# Altium PCB Mic_Array_v2.PcbDoc
Units mm, origin at the board's own origin, x right, y up, seen from the top; angles counter-clockwise.
Board outline 97 x 78 mm, 2 copper layers (Top Layer, Bottom Layer); 105 components, 87 nets, 390 pads, 189 vias.
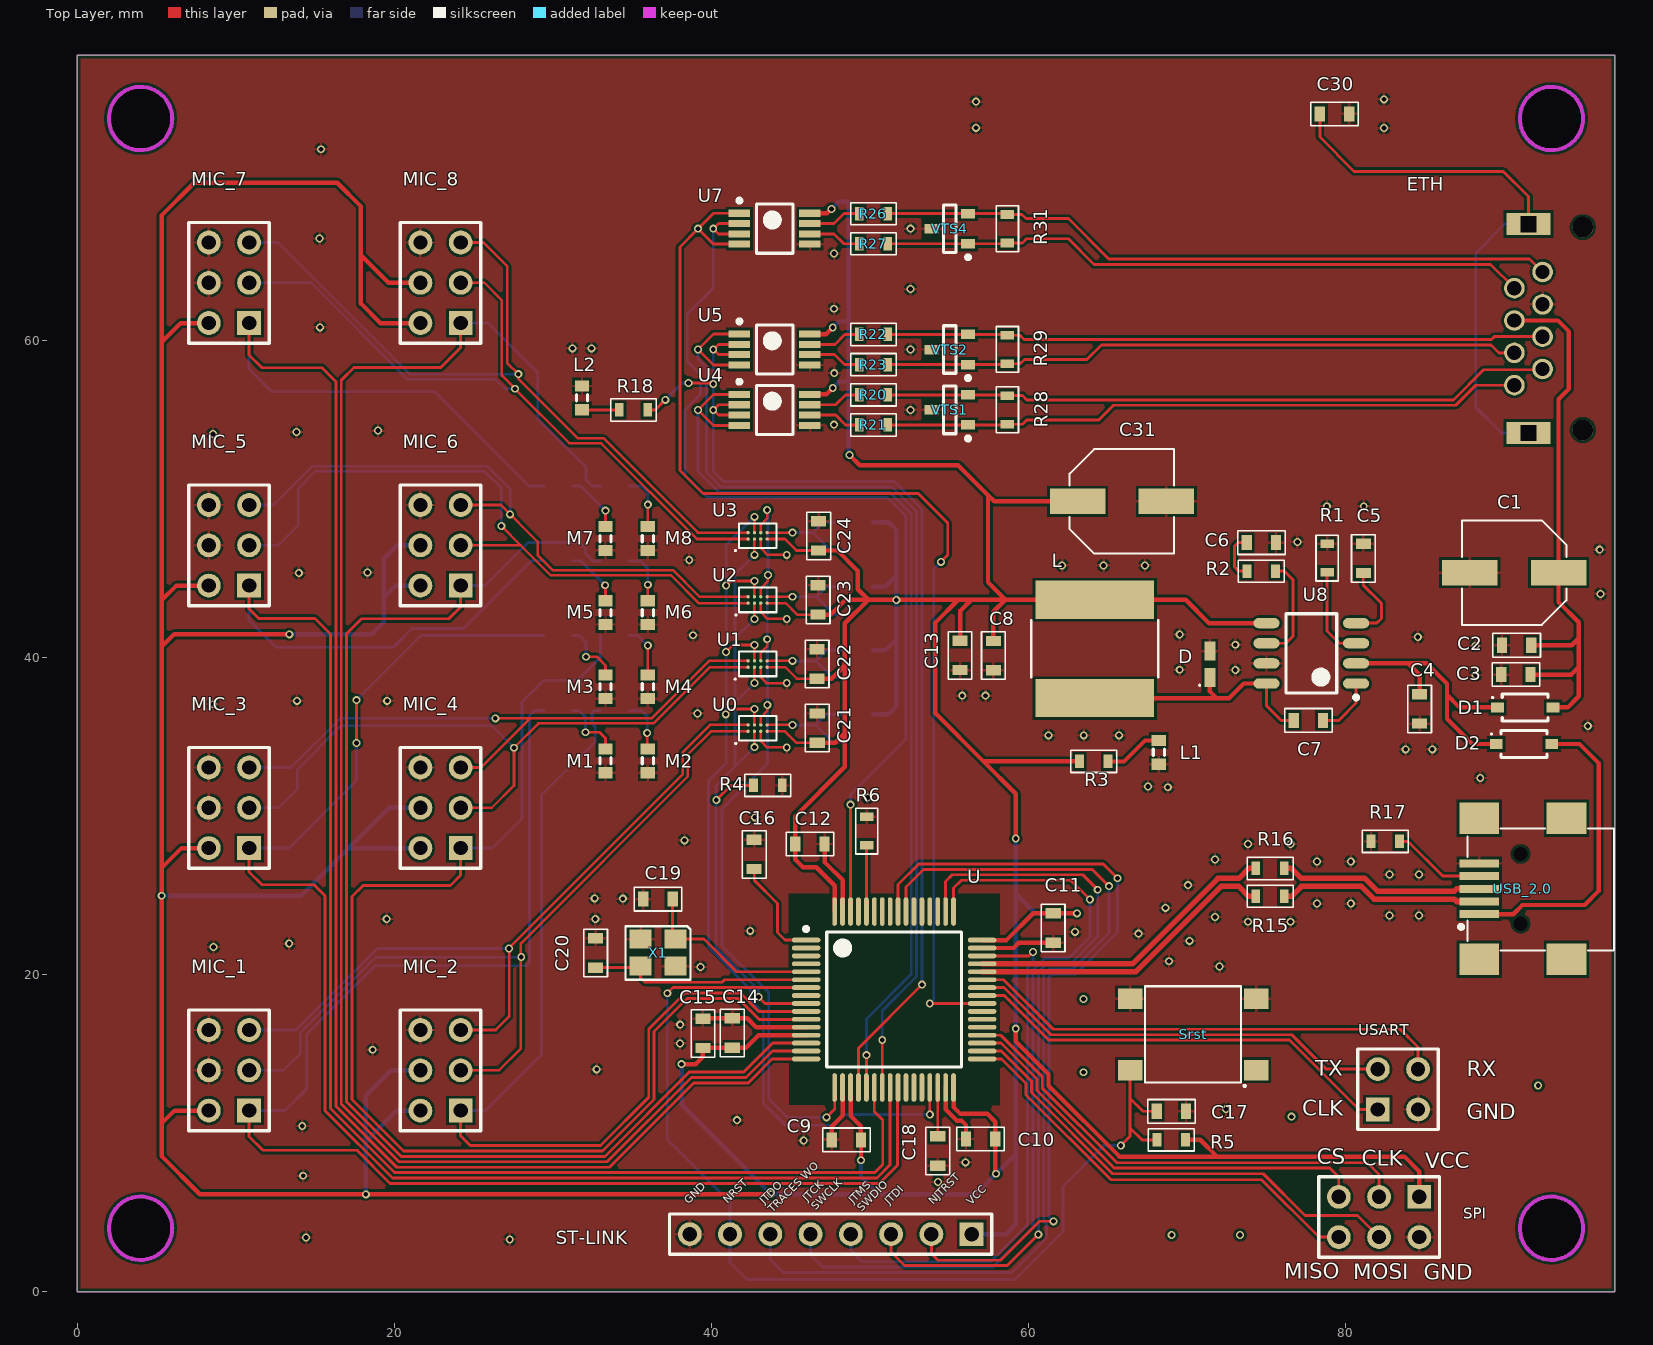
[diagram p0: Top Layer view]
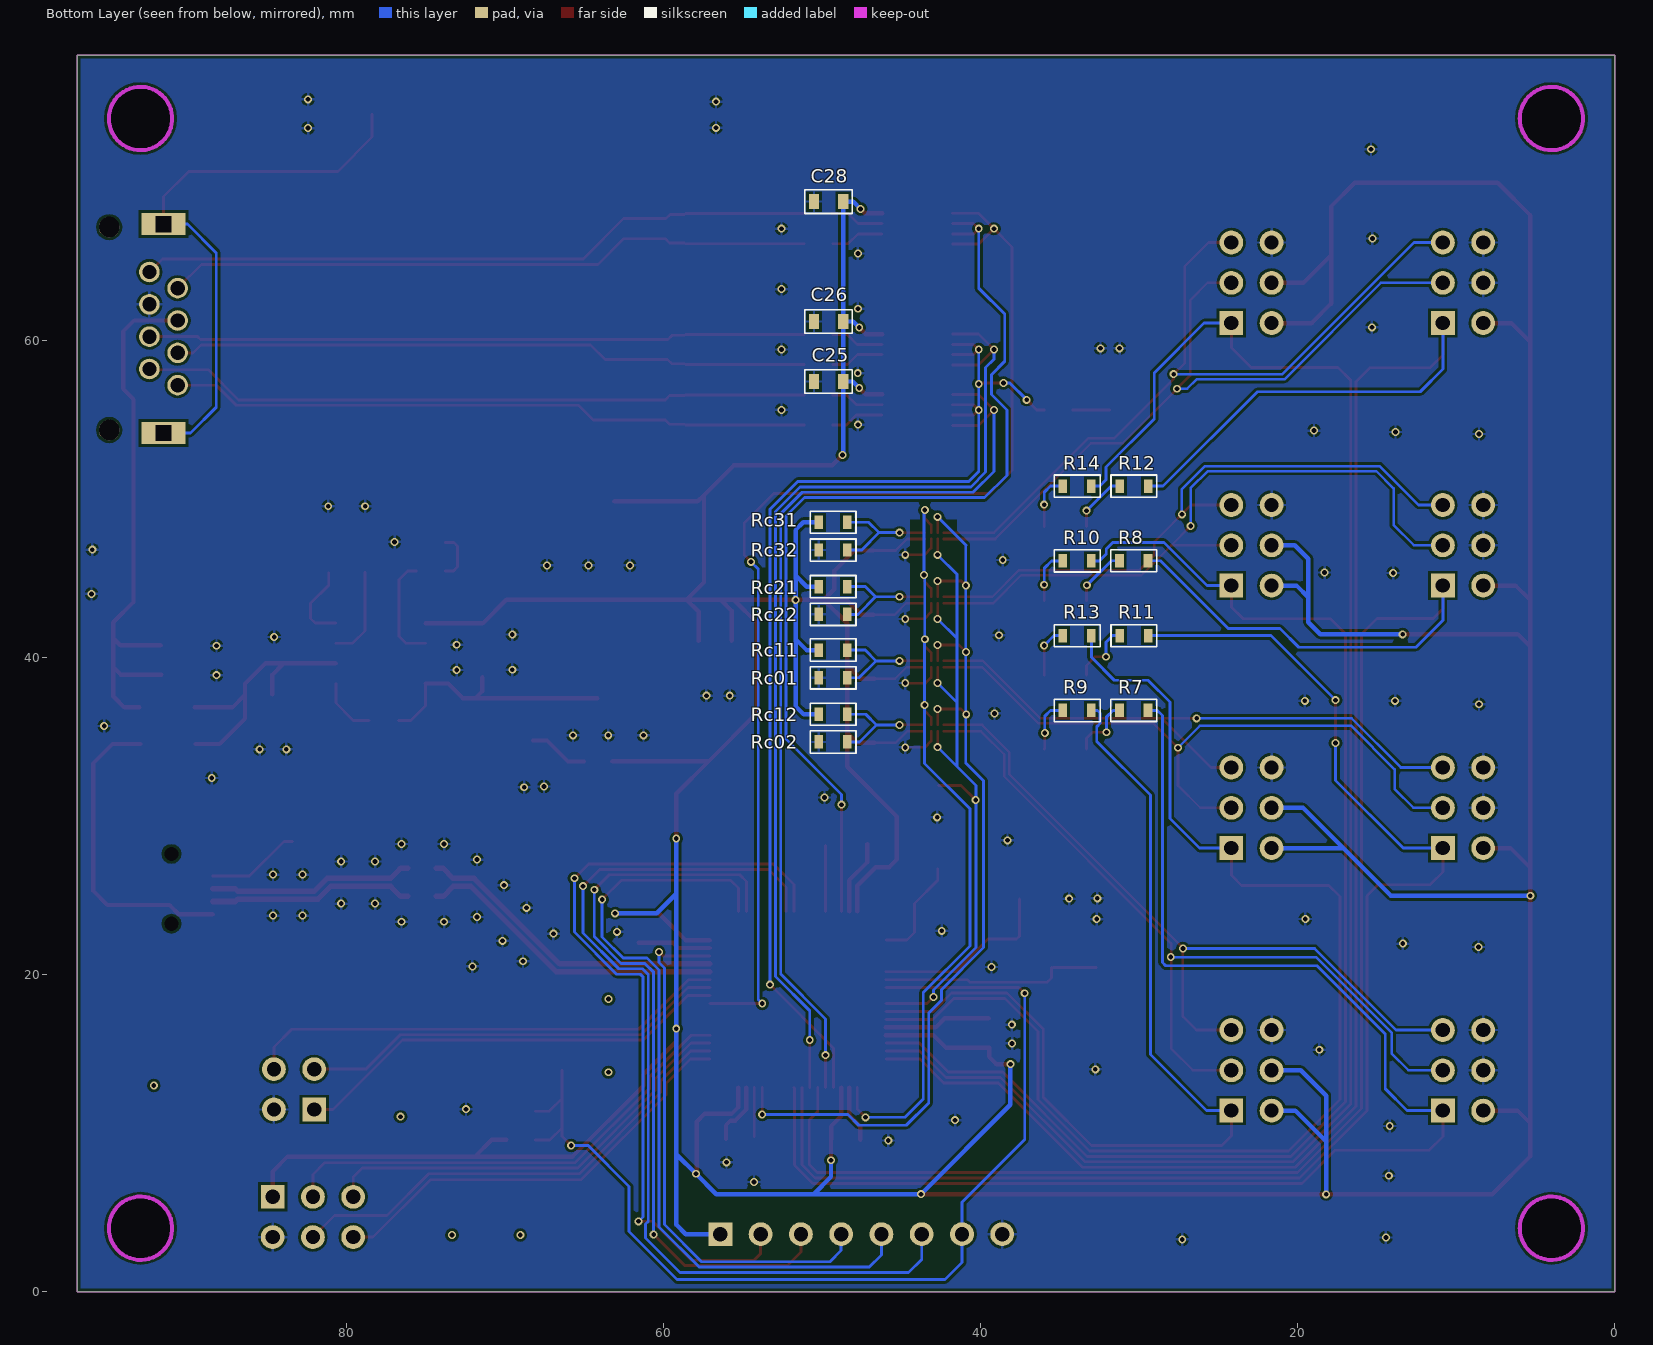
[diagram p1: Bottom Layer view, seen from below]

## Layer stack, top to bottom
Top Solder: solder mask 0.0102, Solder Resist, Dk 3.5
Top Layer: signal copper 0.0356
Dielectric 1: dielectric 0.32, FR-4, Dk 4.8
Bottom Layer: signal copper 0.0356
Bottom Solder: solder mask 0.0102, Solder Resist, Dk 3.5

## Board outline
0,0 0,78 97,78 97,0
cut-out: 91,4 ccw(c93,4) 93,2 ccw(c93,4) 95,4 ccw(c93,4) 93,6 ccw(c93,4)
cut-out: 91,74 ccw(c93,74) 93,72 ccw(c93,74) 95,74 ccw(c93,74) 93,76 ccw(c93,74)
cut-out: 4,72 cw(c4,74) 2,74 cw(c4,74) 4,76 cw(c4,74) 6,74 cw(c4,74)
cut-out: 4,2 cw(c4,4) 2,4 cw(c4,4) 4,6 cw(c4,4) 6,4 cw(c4,4)

## Design rules (kind name [scope] priority, off if disabled: settings)
Clearance [All] p1: gap=0.16
DiffPairsRouting [All] p1: maxlimit=0.5 minlimit=0.16 mostfreqgap=0.16 toplayer_minwidth=0.16 toplayer_maxwidth=1 toplayer_prefwidth=0.35 bottomlayer_minwidth=0.16 bottomlayer_maxwidth=1 bottomlayer_prefwidth=0.35 maxuncoupledlength=12.7
HoleSize [All] p1: absolutevalues=TRUE maxlimit=5 minlimit=0.3 maxpercent=80.000 minpercent=20.000
MinimumSolderMaskSliver [All] p1: minsoldermaskwidth=0.18
PlaneClearance [All] p1: clearance=0.4
PlaneConnect [All] p1: planeconnectstyle=Relief reliefexpansion=0.35 reliefentries=4 reliefconductorwidth=0.18 reliefairgap=0.18
PolygonConnect [All] p1: connectstyle=Relief reliefconductorwidth=0.18 reliefentries=4 polygonreliefangle="90 Angle" airgapwidth=0.16
RoutingCorners [All] p1: cornerstyle=45-Degree minsetback=1.8 maxsetback=2
RoutingVias [All] p1: holewidth=0.3 width=0.37 viastyle="Through Hole" minholewidth=0.3 minwidth=0.35 maxholewidth=5 maxwidth=5
SilkToSilkClearance [All] p1: silktosilkclearance=0
SilkToSolderMaskClearance [IsPad] p1: minsilkscreentomaskgap=0.2 clearancetoexposedcopper=TRUE
SolderMaskExpansion [All] p1: expansion=0.102
Width Power [InNet('VCC') OR InNet('U5V') OR InNet('V_CABLE')OR InNet('GND')OR InNet('NetC4_2') OR InNet ('NetC7_1')] p1: maxlimit=0.4 minlimit=0.16 preferedwidth=0.28
Width [All] p2: maxlimit=0.55 minlimit=0.16 preferedwidth=0.18
22 further rules are at their usual default settings.

## Classes and differential pairs
component class USB: R15 R16 R17 USB_2.0
component class RS485: C25 C26 C28 L2 R18 R20 R21 R22 R23 R26 R27 R28 R29 R31 U4 U5 U7 VTS1 VTS2 VTS4
component class ProgrammerConnectors: ST-LINK
component class Power: C1 C2 C3 C4 C5 C6 C7 C8 C31 Cpoe D D1 D2 L L1 R1 R2 R3 U8
component class MicDSP: C21 C22 C23 C24 Rc01 Rc02 Rc11 Rc12 Rc21 Rc22 Rc31 Rc32 U0 U1 U2 U3
component class MicConnectros: M1 M2 M3 M4 M5 M6 M7 M8 MIC_1 MIC_2 MIC_3 MIC_4 MIC_5 MIC_6 MIC_7 MIC_8 R7 R8 R9 R10 R11 R12 R13 R14
component class MCU_core: C9 C10 C11 C12 C13 C14 C15 C16 C17 C18 C19 C20 R4 R5 R6 Srst U X1
component class EthernetTypeConnectors: C30 ETH
component class AUX_connectros: SPI USART
differential pair D0: +D0_P -D0_N
differential pair D1: +D1_P -D1_N

## Components (designator, comment, footprint, x,y, rotation, side; value= is the part's Value field where it differs from the comment)
C1 "47 μF" "WCAP-PSLP 6.3x5.8x2.2" 90.645,45.357 r180 top
C2 "Cap Semi" CAP0603 90.805,40.775 r0 top
C3 "Cap Semi" CAP0603 90.751,38.926 r0 top
C4 "Cap Semi" CAP0603 84.689,36.759 r90 top
C5 "Cap Semi" CAP0603 81.132,46.258 r270 top
C6 "Cap Semi" CAP0603 74.703,47.25 r180 top
C7 "Cap Semi" CAP0603 77.66,36.036 r0 top
C8 "Cap Semi" CAP0603 57.796,40.117 r90 top
C9 "Cap Semi" CAP0603 48.518,9.572 r0 top locked
C10 "Cap Semi" CAP0603 56.994,9.631 r0 top locked
C11 "Cap Semi" CAP0603 61.572,22.938 r90 top locked
C12 "Cap Semi" CAP0603 46.224,28.238 r180 top locked
C13 "Cap Semi" CAP0603 55.701,40.133 r90 top
C14 "Cap Semi" CAP0603 41.324,16.316 r270 top locked
C15 "Cap Semi" CAP0603 39.475,16.298 r270 top locked
C16 "Cap Semi" CAP0603 42.708,27.588 r270 top locked
C17 "Cap Semi" CAP0603 69.025,11.38 r180 top locked
C18 "Cap Semi" CAP0603 54.287,8.87 r270 top locked
C19 "Cap Semi" CAP0603 36.637,24.758 r0 top locked
C20 "Cap Semi" CAP0603 32.71,21.365 r90 top locked
C21 "Cap Semi" CAP0603 46.685,35.548 r270 top locked
C22 "Cap Semi" CAP0603 46.675,39.591 r270 top locked
C23 "Cap Semi" CAP0603 46.742,43.634 r270 top locked
C24 "Cap Semi" CAP0603 46.774,47.677 r270 top locked
C25 "Cap Semi" CAP0603 49.596,57.413 r0 bottom locked
C26 "Cap Semi" CAP0603 49.596,61.196 r0 bottom locked
C28 "Cap Semi" CAP0603 49.596,68.762 r0 bottom locked
C30 "Cap Semi" CAP0603 79.317,74.295 r180 top
C31 "47 μF" "WCAP-PSLP 6.3x5.8x2.2" 65.905,49.85 r0 top
D "schottky Diode" DIOM1709X08N 71.454,39.576 r90 top
D1 "MRB180S1 schottky" MBR180S1 91.341,36.852 r0 top
D2 "MRB180S1 schottky" MBR180S1 91.272,34.548 r0 top
ETH "RJ48" "TE modular Jack RJ45" 91.55,60.75 r90 top locked
L "74404084150" WE-LQS_8040 64.19,40.544 r90 top
L1 "LED_1.6x0.8mm" J1-0603 68.232,34.019 r270 top
L2 "LED_1.6x0.8mm" J1-0603 31.849,56.383 r90 top
M1 "LED_1.6x0.8mm" J1-0603 33.326,33.481 r270 top locked
M2 "LED_1.6x0.8mm" J1-0603 35.998,33.481 r270 top locked
M3 "LED_1.6x0.8mm" J1-0603 33.326,38.156 r270 top locked
M4 "LED_1.6x0.8mm" J1-0603 35.998,38.156 r270 top locked
M5 "LED_1.6x0.8mm" J1-0603 33.326,42.832 r270 top locked
M6 "LED_1.6x0.8mm" J1-0603 35.998,42.832 r270 top locked
M7 "LED_1.6x0.8mm" J1-0603 33.326,47.507 r270 top locked
M8 "LED_1.6x0.8mm" J1-0603 35.998,47.507 r270 top locked
MIC_1 "Header 3X2" HDR2X3 10.85,11.425 r90 top
MIC_2 "Header 3X2" HDR2X3 24.194,11.425 r90 top
MIC_3 "Header 3X2" HDR2X3 10.85,27.983 r90 top
MIC_4 "Header 3X2" HDR2X3 24.194,27.983 r90 top
MIC_5 "Header 3X2" HDR2X3 10.85,44.542 r90 top
MIC_6 "Header 3X2" HDR2X3 24.194,44.542 r90 top
MIC_7 "Header 3X2" HDR2X3 10.85,61.1 r90 top
MIC_8 "Header 3X2" HDR2X3 24.194,61.1 r90 top
R1 "Res3" RES0603 78.849,46.277 r270 top
R2 "Res3" RES0603 74.698,45.448 r0 top
R3 "Res3" RES0603 64.132,33.445 r180 top
R4 "Res3" RES0603 43.572,31.933 r180 top
R5 "Res3" RES0603 69.019,9.578 r0 top
R6 "Res3" RES0603 49.807,29.056 r270 top locked
R7 "Res3" RES0603 30.345,36.669 r180 bottom locked
R8 "Res3" RES0603 30.345,46.106 r180 bottom locked
R9 "Res3" RES0603 33.924,36.662 r180 bottom locked
R10 "Res3" RES0603 33.924,46.099 r180 bottom locked
R11 "Res3" RES0603 30.341,41.38 r180 bottom locked
R12 "Res3" RES0603 30.341,50.817 r180 bottom locked
R13 "Res3" RES0603 33.924,41.38 r180 bottom locked
R14 "Res3" RES0603 33.924,50.817 r180 bottom locked
R15 "Res3" RES0603 75.251,24.94 r0 top
R16 "Res3" RES0603 75.251,26.695 r0 top
R17 "Res3" RES0603 82.512,28.398 r180 top
R18 "Res3" RES0603 35.094,55.622 r0 top
R20 "pulse-proof" RES0603 50.233,56.57 r0 top locked
R21 "pulse-proof" RES0603 50.233,54.67 r0 top locked
R22 "pulse-proof" RES0603 50.233,60.38 r0 top locked
R23 "pulse-proof" RES0603 50.233,58.48 r0 top locked
R26 "pulse-proof" RES0603 50.233,68 r0 top locked
R27 "pulse-proof" RES0603 50.233,66.1 r0 top locked
R28 "pulse-proof" RES0603 58.677,55.62 r90 top locked
R29 "pulse-proof" RES0603 58.677,59.43 r90 top locked
R31 "pulse-proof" RES0603 58.677,67.05 r90 top locked
Rc01 "Res3" RES0603 49.315,36.425 r0 bottom locked
Rc02 "Res3" RES0603 49.319,34.676 r180 bottom locked
Rc11 "Res3" RES0603 49.315,40.469 r0 bottom locked
Rc12 "Res3" RES0603 49.319,38.721 r180 bottom locked
Rc21 "Res3" RES0603 49.315,44.474 r0 bottom locked
Rc22 "Res3" RES0603 49.319,42.725 r180 bottom locked
Rc31 "Res3" RES0603 49.315,48.531 r0 bottom locked
Rc32 "Res3" RES0603 49.319,46.783 r180 bottom locked
SPI "Header 3X2" HDR2X3 84.666,5.982 r180 top
Srst "430152043826" 4301x20438x6 70.394,16.229 r180 top locked
ST-LINK "Header 8" HDR1X8 56.425,3.625 r180 top
U "STM32F446RET6" LQFP64_N 51.536,18.429 r0 top locked
U0 "ADAU7002" ADAU7002_ 42.925,35.548 r90 top locked
U1 "ADAU7002" ADAU7002_ 42.925,39.591 r90 top locked
U2 "ADAU7002" ADAU7002_ 42.925,43.634 r90 top locked
U3 "ADAU7002" ADAU7002_ 42.925,47.677 r90 top locked
U4 "SN65HVD78" SOP127P600-8N 44,55.62 r0 top locked
U5 "SN65HVD78" SOP127P600-8N 44,59.43 r0 top locked
U7 "SN65HVD78" SOP127P600-8N 44,67.05 r0 top locked
U8 "TPS5403" SOIC127P600X175-8M 77.851,40.266 r180 top
USART "Header 2X2" HDR2X2 82.048,11.495 r0 top
USB_2.0 "65100516121" 65100516121 91.049,25.411 r90 top locked
VTS1 "CDSOT23-SM712" SOT190P230X117-3N 55.048,55.62 r180 top locked
VTS2 "CDSOT23-SM712" SOT190P230X117-3N 55.048,59.43 r180 top locked
VTS4 "CDSOT23-SM712" SOT190P230X117-3N 55.048,67.05 r180 top locked
X1 "Resonator" ABM8G 36.642,21.387 r180 top locked

## Footprints (in the part's own frame and the unit in brackets; to place one, negate y for a bottom-side part, rotate by r counter-clockwise, add the part's x,y. Pads: shape width x height; smd on the part's side, far side on the other; paste and mask are expansions set on the pad)
4301x20438x6 [mm] "6*6mm vertical type, SMD, height 4.3mm, black actuator, 160gf, T&R"
  rect 1.55x1.3 smd: 1(-3.975,2.25) 2(-3.975,-2.25) 3(3.975,2.25) 4(3.975,-2.25)
  silkscreen extent -3.29,-3.04 3.04,3.29, body extent -4.5,-3.1 4.5,3.1, height 4.29
65100516121 [mm] "5 pins"
  rect 0.5x2.5 smd: 1(-1.6,2.6) 2(-0.8,2.6) 3(0,2.6) 4(0.8,2.6) 5(1.6,2.6)
  rect 2x2.5 smd: Shell(-4.45,-2.9) Shell(-4.45,2.6) Shell(4.45,-2.9) Shell(4.45,2.6)
  round 0.7 hole 0.9 unplated: ""(-2.2,0) ""(2.2,0)
  silkscreen extent -3.9,-5.9 3.8,3.87, body extent -4.8,-5.9 4.8,3.35, height 3.9
ABM8G [mm] "resonator"
  rect 1.4x1.2 smd: 1(-1.1,-0.85) 2(1.1,-0.85) 3(1.1,0.85) 4(-1.1,0.85)
  silkscreen extent -2.05,-1.68 2.05,1.7, body extent -1.62,-1.2 1.63,1.3, height 1
ADAU7002_ [mm] "BGA, 8-Leads, Body 0.76x1.56mmx0.56mm, Pitch 0.40mm"
  round 0.21 smd: A1(-0.2,0.6) A2(0.2,0.6) B1(-0.2,0.2) B2(0.2,0.2) C1(-0.2,-0.2) C2(0.2,-0.2) D1(-0.2,-0.6) D2(0.2,-0.6)
  silkscreen extent -1.02,1.33 -0.92,1.43, body extent -0.38,-0.78 0.38,0.78, height 0.56
CAP0603 [mm]
  rect 0.65x0.95 smd: 1(-0.925,0) 2(0.925,0)
  silkscreen extent -1.5,-0.74 1.5,0.75, body extent -0.8,-0.4 0.8,0.4, height 0.2
DIOM1709X08N [mm] "Molded Diode, 2-Leads, Body 1.70x0.90mm, IPC Medium Density"
  rect 1.2x0.7 smd: 1(-0.825,0) 2(0.825,0)
  silkscreen extent -1.37,0.6 -1.28,0.7, body extent -0.9,-0.5 0.9,0.5, height 0.85
HDR1X8 [mm] "Connector; Header; 8 Position"
  rect 1.5x1.5 hole 0.9: 1(0,0)
  round 1.5 hole 0.9: 2(2.54,0) 3(5.08,0) 4(7.62,0) 5(10.16,0) 6(12.7,0) 7(15.24,0) 8(17.78,0)
  silkscreen extent -1.27,-1.27 19.05,1.27
HDR2X2 [mm] "Connector; Header; 2x2 Position"
  rect 1.5x1.5 hole 0.9: 1(0,0)
  round 1.5 hole 0.9: 2(0,2.54) 3(2.54,0) 4(2.54,2.54)
  silkscreen extent -1.27,-1.27 3.81,3.81
HDR2X3 [mm] "Connector; Header; 3x2 Position"
  rect 1.5x1.5 hole 0.9: 1(0,0)
  round 1.5 hole 0.9: 2(0,2.54) 3(2.54,0) 4(2.54,2.54) 5(5.08,0) 6(5.08,2.54)
  silkscreen extent -1.27,-1.27 6.35,3.81
J1-0603 [mm] "Chip Resistor, Body 1.6x0.8mm, IPC High Density"
  rect 0.7x0.9 smd: 1(-0.75,0) 2(0.75,0)
  silkscreen extent -0.2,-0.35 0.2,0.35, body extent -0.85,-0.48 0.85,0.48, height 0.9
LQFP64_N [mm] "Thin QFP, 64-Leads, Body 10x10mm, Pitch 0.5mm, IPC Medium Density"
  oval 1.8x0.3 smd: 1(-5.55,3.75) 2(-5.55,3.25) 3(-5.55,2.75) 4(-5.55,2.25) 5(-5.55,1.75) 6(-5.55,1.25) 7(-5.55,0.75) 8(-5.55,0.25) 9(-5.55,-0.25) 10(-5.55,-0.75) 11(-5.55,-1.25) 12(-5.55,-1.75) 13(-5.55,-2.25) 14(-5.55,-2.75) 15(-5.55,-3.25) 16(-5.55,-3.75) 33(5.55,-3.75) 34(5.55,-3.25) 35(5.55,-2.75) 36(5.55,-2.25) 37(5.55,-1.75) 38(5.55,-1.25) 39(5.55,-0.75) 40(5.55,-0.25) 41(5.55,0.25) 42(5.55,0.75) 43(5.55,1.25) 44(5.55,1.75) 45(5.55,2.25) 46(5.55,2.75) 47(5.55,3.25) 48(5.55,3.75)
  oval 0.3x1.8 smd: 17(-3.75,-5.55) 18(-3.25,-5.55) 19(-2.75,-5.55) 20(-2.25,-5.55) 21(-1.75,-5.55) 22(-1.25,-5.55) 23(-0.75,-5.55) 24(-0.25,-5.55) 25(0.25,-5.55) 26(0.75,-5.55) 27(1.25,-5.55) 28(1.75,-5.55) 29(2.25,-5.55) 30(2.75,-5.55) 31(3.25,-5.55) 32(3.75,-5.55) 49(3.75,5.55) 50(3.25,5.55) 51(2.75,5.55) 52(2.25,5.55) 53(1.75,5.55) 54(1.25,5.55) 55(0.75,5.55) 56(0.25,5.55) 57(-0.25,5.55) 58(-0.75,5.55) 59(-1.25,5.55) 60(-1.75,5.55) 61(-2.25,5.55) 62(-2.75,5.55) 63(-3.25,5.55) 64(-3.75,5.55)
  silkscreen extent -5.67,-4.25 4.25,4.57, body extent -5,-5 5,5, height 1.6
MBR180S1 [mm] "SODFL, 2-Leads, Body 1.55x3.70mm, IPC Medium Density"
  rect 0.8x0.65 smd: 1(-1.75,0) 2(1.75,0)
  silkscreen extent -2.1,-0.85 1.45,0.85, body extent -1.42,-0.85 1.43,0.85, height 1.35
RES0603 [mm]
  rect 0.55x0.85 smd: 1(-0.9,0) 2(0.9,0)
  silkscreen extent -1.45,-0.7 1.45,0.7, body extent -0.8,-0.4 0.8,0.4, height 0.2
SOIC127P600X175-8M [mm] "SOIC, 8-Leads, Body 4.90x3.90mm, Pitch 1.27mm, IPC Low Density"
  oval 1.65x0.65 smd: 1(-2.825,1.905) 2(-2.825,0.635) 3(-2.825,-0.635) 4(-2.825,-1.905) 5(2.825,-1.905) 6(2.825,-0.635) 7(2.825,0.635) 8(2.825,1.905)
  silkscreen extent -2.95,-2.5 1.6,2.9, body extent -2,-2.5 2,2.5, height 1.75
SOP127P600-8N [mm]
  rect 1.35x0.45 smd: 1(-2.225,0.975) 2(-2.225,0.325) 3(-2.225,-0.325) 4(-2.225,-0.975) 5(2.225,-0.975) 6(2.225,-0.325) 7(2.225,0.325) 8(2.225,0.975)
  silkscreen extent -2.35,-1.55 1.15,1.9, body extent -1.55,-1.55 1.55,1.55, height 1.1
SOT190P230X117-3N [mm] "SOT223, 3-Leads, Body 2.90x2.30mm (avg), Pitch 1.90mm, IPC Medium Density"
  rect 0.9x0.6 smd: 1(-1.15,0.95) 2(-1.15,-0.95) 3(1.15,0)
  silkscreen extent -1.28,-1.5 0.4,1.92, body extent -0.7,-1.5 0.7,1.5, height 1.17
"TE modular Jack RJ45" [mm] "ethernet connector"
  round 1.3 hole 0.9: 1(3.57,-0.89) 2(2.55,0.89) 3(1.53,-0.89) 4(0.51,0.89) 5(-0.51,-0.89) 6(-1.53,0.89) 7(-2.55,-0.89) 8(-3.57,0.89)
  rect 1.4x2.8 hole 1 square: 9(-6.59,0) 9(6.59,0)
  round 1.3 hole 1.31 unplated: ""(-6.4,-3.43) ""(6.4,-3.43)
  body extent -8.1,-6 8.1,9, height 11.3
"WCAP-PSLP 6.3x5.8x2.2" [mm] "Polarized capacitors, Aluminum Polymer Capacitors, 2-Leads, Body 6.3x5.8x2.2"
  rect 3.5x1.6 smd: 1(-2.8,0) 2(2.8,0)
  silkscreen extent -3.3,-3.3 3.3,3.3, body extent -3.65,-3.3 3.65,3.3, height 5.75
WE-LQS_8040 [mm] "SMD Power Inductor, 2-Leads, body 8.0x8.0mm"
  rect 2.4x7.5 smd: 1(-3.1,0) 2(3.1,0)
  silkscreen extent -1.8,-4 1.8,4, body extent -4,-4 4,4, height 4.25

## Part data
C1 C31: library part "WCAP-PSLP 6.3x5.8x2.2 875105344006", "WCAP-PSLP Aluminum Polymer Capacitors , 47 µF; + / - 20%; 16 V , 6,3 x 5,8"
C2 C3 C4 C5 C6 C7 C8 C9 C10 C11 C12 C13 C14 C15 C16 C17 C18 C19 C20 C21 C22 C23 C24 C25 C26 C28 C30: "Capacitor (Semiconductor SIM Model)"
D: library part SMD_schottky_CDBU0130L
ETH: library part "Ethernet Jack"
L: "WE-LQS SMD Power Inductor, size 8040, 15 uH"
MIC_1 MIC_2 MIC_3 MIC_4 MIC_5 MIC_6 MIC_7 MIC_8 SPI: "Header, 3-Pin, Dual row"
R1 R2 R3 R4 R5 R6 R7 R8 R9 R10 R11 R12 R13 R14 R15 R16 R17 R18 Rc01 Rc02 Rc11 Rc12 Rc21 Rc22 Rc31 Rc32: "Resistor"
R20 R21 R22 R23 R26 R27 R28 R29 R31: library part Res3, "Resistor"
Srst: library part "WS-TASV, 430152043826", "WS-TASV 6x6 mm SMD"
ST-LINK: "Header, 8-Pin"
U: library part STM32F101RBT6, "STM32 ARM-based 32-bit MCU with 128 Kbytes Flash, 64-pin LQFP, Industrial Temperature"
U4 U5 U7: library part sn65hvd7x
U8: "switching power-3.3V"
USART: "Header, 2-Pin, Dual row"
USB_2.0: "WR-COM Mini USB 2.0 Type B SMT Horizontal 5 Contacts"
X1: library part ABM8G-MHz

## Via types
v1: diameter 0.5, hole 0.3, Top Layer to Bottom Layer, tented both sides, 189 vias

## Nets (pads, with @x,y where several pads share a name; then routed paths per layer and width w, separated by ;. In a path a pad name is that pad's centre, name@x,y a point inside that pad or via, vN(x,y) a via of type N, cw(c..) or ccw(c..) an arc to the next point about the centre after c; other vN are vias at no path point)
D0_N: R15.1 U.44 | length 19.8
  Top Layer w0.35: U.44@57.086,20.169 66.773,20.169 72.167,25.563 73.278,25.563 73.901,24.94 R15.1
D0_P: R16.1 U.45 | length 19.8
  Top Layer w0.35: U.45 66.562,20.679 71.956,26.073 73.278,26.073 73.901,26.695 R16.1
D1_N: R15.2 USB_2.0.2 | length 13
  Top Layer w0.35: R15.2 76.601,24.94 77.224,25.563 81.013,25.563 81.804,24.772 81.823,24.753 86.882,24.753 87.024,24.611 USB_2.0.2
D1_P: R16.2 USB_2.0.3 | length 13
  Top Layer w0.35: R16.2 76.601,26.695 77.224,26.073 81.225,26.073 82.034,25.263 86.876,25.263 87.024,25.411 USB_2.0.3
GND: C1.2 C2.1 C3.1 C4.1 C5.1 C6.1 C8.1 C9.1 C10.1 C11.1 C12.1 C13.1 C14.1 C15.1 C16.1 C17.1 C18.2 C19.1 C20.2 C21.1 C22.1 C23.1 C24.1 C25.2 C26.2 C28.2 C30.1 C31.2 D.2 ETH.3 L1.2 L2.2 M1.2 M2.2 M3.2 M4.2 M5.2 M6.2 M7.2 M8.2 MIC_1.4 MIC_1.6 MIC_2.6 MIC_3.4 MIC_3.6 MIC_4.6 MIC_5.4 MIC_5.6 MIC_6.6 MIC_7.4 MIC_7.6 MIC_8.6 R1.1 R4.1 R6.1 R17.2 Rc02.1 Rc12.1 Rc22.1 Rc32.1 SPI.2 Srst.2 Srst.4 ST-LINK.8 U0.C1 U1.C1 U2.C1 U3.C1 U4.5 U5.5 U7.5 U8.7 U.12 U.18 U.31 U.47 U.63 USART.3 USB_2.0.5 VTS1.3 VTS2.3 VTS4.3 X1.2 X1.4 | length 33.3
  Top Layer w0.16: U0.C1 43.125,34.732 43.525,34.332 v1(44.761,34.332) ; U1.C1 43.125,38.738 43.472,38.391 v1(44.761,38.391) ; U2.C1 43.125,42.861 43.552,42.434 v1(44.761,42.434) ; U3.C1 43.125,46.908 43.556,46.477 v1(44.761,46.477)
  Top Layer w0.28: C15.1@39.493,17.241 C14.1 42.265,17.241 42.827,16.679 U.12 ; C12.1 47.149,27.099 48.286,25.962 U.63 ; C9.1 47.593,10.422 48.286,11.115 U.18 ; U.31 54.786,11.491 55.484,10.793 55.787,10.793 56.069,10.511 C10.1 ; U.47 59.068,21.679 59.402,22.013 C11.1
  other v1: 27.29,3.296 14.444,3.418 54.3,6.919 14.261,7.314 56.035,8.156 45.829,9.531 14.2,10.45 41.618,10.82 72.468,11.51 32.771,14.023 18.644,15.26 38.023,15.661 38.037,16.84 39.321,20.483 72.065,20.517 68.877,20.843 8.599,21.743 13.378,21.957 70.169,22.129 66.958,22.58 62.946,22.697 42.461,22.762 73.852,23.334 76.543,23.334 32.687,23.5 19.527,23.509 71.777,23.631 82.778,23.721 84.639,23.721 68.648,24.214 78.204,24.48 80.342,24.48 34.423,24.79 32.648,24.809 70.079,25.641 82.779,26.307 84.64,26.307 78.204,27.133 80.342,27.133 71.777,27.254 73.852,28.24 76.543,28.24 38.309,28.471 42.751,29.922 49.858,31.169 68.802,31.817 67.548,31.869 88.51,32.398 83.804,34.212 85.486,34.212 61.274,35.093 63.498,35.093 65.723,35.093 95.296,35.686 39.131,36.477 8.568,37.055 13.865,37.268 19.558,37.268 55.831,37.596 57.305,37.596 88.205,38.89 73.058,39.21 69.548,39.231 88.205,40.746 73.058,40.809 84.568,41.297 38.857,41.408 69.548,41.452 96.091,44.014 13.987,45.335 18.31,45.365 62.133,45.812 64.749,45.812 67.364,45.812 38.614,46.157 96.041,46.807 76.972,47.294 78.831,49.544 81.158,49.544 8.568,54.102 13.835,54.224 18.979,54.315 47.75,54.688 52.573,55.62 47.761,57.939 52.573,59.43 31.24,59.503 32.45,59.503 15.326,60.829 47.75,62 52.573,63.24 47.75,65.49 15.296,66.431 52.573,67.05 15.387,72.062 82.43,73.398 56.703,73.416 56.703,75.063 82.43,75.209
NetC4_2: C4.2 D1.1 D2.1 U8.2 | length 18
  Top Layer w0.28: U8.2 83.962,39.631 ; C4.2 84.689,38.904 83.962,39.631 ; D2.1 87.997,34.548 86.412,36.133 86.412,37.645 ; D1.1 87.205,36.852 86.412,37.645 ; 83.962,39.631 85.121,39.631 86.412,38.34 86.412,37.645
NetC5_2: C5.2 U8.4 | length 5.1
  Top Layer w0.18: U8.4 81.975,42.171 82.275,42.471 82.275,43.42 81.132,44.563 C5.2
NetC6_2: C6.2 R2.1 | length 3.1
  Top Layer w0.18: C6.2 73.232,47.25 72.998,47.016 72.998,45.728 73.278,45.448 R2.1
NetC7_1: C7.1 D.1 L.1 U8.8 | length 16.2
  Top Layer w0.18: U8.8 75.026,36.963 75.953,36.036 C7.1
  Top Layer w0.28: L.1 72.677,37.444 73.594,38.361 U8.8 ; D.1 71.454,37.858 71.867,37.445
NetC7_2: C7.2 U8.1 | length 3.8
  Top Layer w0.18: C7.2 79.585,36.036 80.676,37.127 U8.1
NetC16_2: C16.2 U.1 | length 6.6
  Top Layer w0.18: C16.2 42.708,25.95 44.176,24.482 44.176,22.649 44.646,22.179 U.1
NetC17_2: C17.2 R5.1 Srst.3 ST-LINK.7 U.7 | length 66.8
  Top Layer w0.18: v1(37.229,18.823) 37.585,19.179 U.7 ; v1(65.836,9.216) 66.419,9.799 66.419,10.332 ; Srst.3 66.419,12.19 ; C17.2 67.229,11.38 66.419,12.19 ; R5.1 67.174,9.578 66.419,10.332 ; 66.419,10.332 66.419,12.19
  Bottom Layer w0.18: v1(37.229,18.823) 37.229,9.6 41.185,5.644 ST-LINK.7 41.185,1.83 42.246,0.769 59.169,0.769 62.187,3.787 62.187,6.641 64.762,9.216 v1(65.836,9.216)
NetC18_1: C18.1 U.30 | length 3.1
  Top Layer w0.18: U.30 54.286,9.796 C18.1
NetC19_2: C19.2 U.5 X1.1 | length 11.7
  Top Layer w0.18: C19.2 37.562,22.417 X1.1 39.539,22.237 41.597,20.179 U.5
NetC20_1: C20.1 U.6 X1.3 | length 14
  Top Layer w0.18: C20.1 X1.3@35.445,20.44 ; X1.3@35.542,20.44 35.542,19.793 35.816,19.519 40.681,19.519 40.841,19.679 U.6
NetC30_2: C30.2 ETH.9 | length 35.7
  Top Layer w0.18: C30.2 78.392,72.828 80.551,70.669 89.963,70.669 91.55,69.082 ETH.9@91.55,67.34
  Bottom Layer w0.18: ETH.9@91.55,54.16 89.856,54.16 88.225,55.791 88.225,65.528 90.037,67.34 ETH.9@91.55,67.34
NetETH_1: ETH.1 R26.2 R31.2 VTS4.2 | length 42.8
  Top Layer w0.18: R26.2 VTS4.2 R31.2@58.627,68 ; R31.2 59.59,67.95 59.855,67.685 62.525,67.685 65.069,65.141 91.619,65.141 ETH.1
NetETH_2: ETH.2 R27.2 R31.1 VTS4.1 | length 40.9
  Top Layer w0.18: R27.2 VTS4.1 R31.1@58.627,66.1 ; R31.1 59.63,66.15 59.895,66.415 62.525,66.415 64.139,64.801 89.159,64.801 ETH.2
NetETH_5: ETH.5 R22.2 R29.2 VTS2.2 | length 41.4
  Top Layer w0.18: R22.2 VTS2.2 R29.2@58.627,60.38 ; R29.2 59.463,60.33 59.728,60.065 89.217,60.065 89.392,60.24 ETH.5
NetETH_6: ETH.6 R23.2 R29.1 VTS2.1 | length 40.2
  Top Layer w0.18: R23.2 VTS2.1 R29.1@58.627,58.48 ; R29.1 59.486,58.53 59.751,58.795 63.688,58.795 64.618,59.725 89.187,59.725 89.692,59.22 ETH.6
NetETH_7: ETH.7 R20.2 R28.2 VTS1.2 | length 42.2
  Top Layer w0.18: R20.2 VTS1.2 R28.2@58.627,56.57 ; R28.2 59.636,56.52 59.901,56.255 86.818,56.255 88.715,58.152 92.392,58.152 ETH.7
NetETH_8: ETH.8 R21.2 R28.1 VTS1.1 | length 40.5
  Top Layer w0.18: R21.2 VTS1.1 R28.1@58.627,54.67 ; R28.1 59.634,54.72 59.899,54.985 64.443,54.985 65.373,55.915 86.959,55.915 88.224,57.18 ETH.8
NetL1_1: L1.1 R3.1 | length 3.7
  Top Layer w0.25: R3.1 66.043,33.445 67.367,34.769 L1.1
NetL2_1: L2.1 R18.1 | length 2.3
  Top Layer w0.18: L2.1@31.849,55.622 R18.1
NetM1_1: M1.1 R7.1 | length 4.1
  Top Layer w0.18: v1(32.068,35.289) 32.949,35.289 33.326,34.912 M1.1
  Bottom Layer w0.18: R7.1 31.654,36.669 32.057,36.266 32.057,35.3 v1(32.068,35.289)
NetM2_1: M2.1 R9.1 | length 3.4
  Top Layer w0.18: v1(35.96,35.24) 35.96,34.269 M2.1
  Bottom Layer w0.18: R9.1 35.599,36.662 35.96,36.301 v1(35.96,35.24)
NetM3_1: M3.1 R11.1 | length 4
  Top Layer w0.18: v1(32.106,40.05) 32.783,40.05 33.326,39.507 M3.1
  Bottom Layer w0.18: R11.1 31.69,41.38 32.106,40.964 v1(32.106,40.05)
NetM4_1: M4.1 R13.1 | length 3.3
  Top Layer w0.18: M4.1 v1(35.998,40.766)
  Bottom Layer w0.18: R13.1 35.384,41.38 v1(35.998,40.766)
NetM5_1: M5.1 R8.1 | length 3.7
  Top Layer w0.18: v1(33.309,44.559) 33.326,44.542 M5.1
  Bottom Layer w0.18: R8.1 31.762,46.106 v1(33.309,44.559)
NetM6_1: M6.1 R10.1 | length 3.4
  Top Layer w0.18: M6.1 v1(35.998,44.593)
  Bottom Layer w0.18: R10.1 35.535,46.099 35.998,45.636 v1(35.998,44.593)
NetM7_1: M7.1 R12.1 | length 3.7
  Top Layer w0.18: M7.1 v1(33.326,49.264)
  Bottom Layer w0.18: R12.1 31.773,50.817 v1(33.326,49.264)
NetM8_1: M8.1 R14.1 | length 3.5
  Top Layer w0.18: M8.1 v1(35.998,49.643)
  Bottom Layer w0.18: R14.1 35.604,50.817 35.998,50.423 v1(35.998,49.643)
NetMIC_1_1: MIC_1.1 R7.2 U.25 | length 89.3
  Top Layer w0.18: MIC_1.1 10.85,9.785 11.719,8.916 17.654,8.916 19.738,6.832 50.593,6.832 51.74,7.979 51.74,12.833 U.25
  Bottom Layer w0.18: MIC_1.1 13.11,11.425 14.488,12.803 14.488,16.262 18.782,20.556 28.327,20.556 28.535,20.764 28.535,36.337 28.867,36.669 R7.2
NetMIC_1_3: MIC_1.3 MIC_2.3 U0.A1 | length 52.6
  Top Layer w0.16: MIC_2.3 26.614,13.965 27.988,15.339 v1@27.988,21.107 ; v1(28.017,21.107) v1@27.988,21.107 ; U0.A1 39.974,35.348 38.516,33.89 38.516,32.499 27.988,21.971 v1@27.988,21.107
  Bottom Layer w0.16: MIC_1.3 13.025,13.965 14.078,15.018 14.078,16.336 18.849,21.107 v1(28.017,21.107)
NetMIC_1_5: MIC_1.5 MIC_2.5 U0.A2 | length 48
  Top Layer w0.16: MIC_2.5 26.4,16.505 27.247,17.352 v1(27.247,21.647) 27.247,21.683 38.196,32.632 38.196,34.023 39.921,35.748 U0.A2
  Bottom Layer w0.16: MIC_1.5 13.794,16.505 18.936,21.647 v1(27.247,21.647)
NetMIC_2_1: MIC_2.1 R9.2 U.10 | length 60.9
  Top Layer w0.18: MIC_2.1 24.194,9.813 24.795,9.212 33.007,9.212 36.057,12.262 36.057,16.56 38.336,18.839 41.841,18.839 43.001,17.679 U.10
  Bottom Layer w0.18: MIC_2.1 25.767,11.425 29.295,14.953 29.295,31.322 32.683,34.71 32.683,35.632 32.468,35.847 32.468,36.493 32.637,36.662 R9.2
NetMIC_3_1: MIC_3.1 R11.2 U.24 | length 90.2
  Top Layer w0.18: MIC_3.1 10.85,26.478 11.662,25.666 14.944,25.666 15.641,24.969 15.641,11.416 19.885,7.172 50.452,7.172 51.286,8.006 U.24 ; v1(17.62,34.608) v1(17.62,37.313)
  Bottom Layer w0.18: MIC_3.1 13.354,27.983 17.62,32.249 v1(17.62,34.608) ; v1(17.62,37.313) 21.687,41.38 R11.2
NetMIC_3_3: MIC_3.3 MIC_4.3 U1.A1 | length 43.3
  Top Layer w0.16: MIC_4.3 26.155,30.523 27.559,31.927 v1(27.559,34.31) 29.096,35.847 36.369,35.847 39.913,39.391 U1.A1
  Bottom Layer w0.16: MIC_3.3 12.709,30.523 13.892,31.706 13.892,32.951 16.624,35.683 26.186,35.683 v1(27.559,34.31)
NetMIC_3_5: MIC_3.5 MIC_4.5 U1.A2 | length 39.9
  Top Layer w0.16: MIC_4.5 25.469,33.063 28.573,36.167 ; v1(26.379,36.167) 28.573,36.167 ; U1.A2 39.86,39.791 36.236,36.167 28.573,36.167
  Bottom Layer w0.16: MIC_3.5 13.494,33.063 16.598,36.167 v1(26.379,36.167)
NetMIC_4_1: MIC_4.1 R13.2 U.11 | length 78.4
  Top Layer w0.18: MIC_4.1 24.194,26.279 23.546,25.631 18.045,25.631 17.341,24.927 17.341,12.12 20.589,8.872 33.148,8.872 36.397,12.121 36.397,16.419 38.477,18.499 41.699,18.499 43.019,17.179 U.11
  Bottom Layer w0.18: MIC_4.1 26.207,27.983 28.069,29.845 28.069,37.187 29.449,38.567 31.575,38.567 33.024,40.016 R13.2
NetMIC_5_1: MIC_5.1 R8.2 U.22 | length 102.7
  Top Layer w0.18: MIC_5.1 10.85,43.076 11.459,42.467 14.995,42.467 15.981,41.481 15.981,11.557 20.026,7.512 50.311,7.512 50.82,8.021 50.82,10.824 50.286,11.358 U.22
  Bottom Layer w0.18: MIC_5.1 10.85,42.35 12.55,40.65 19.944,40.65 21.131,41.837 24.387,41.837 28.656,46.106 R8.2
NetMIC_5_3: MIC_5.3 MIC_6.3 U2.A1 | length 43.4
  Top Layer w0.16: MIC_6.3 27.977,47.082 ; v1(26.756,48.303) 27.977,47.082 ; U2.A1 39.209,43.434 37.451,45.192 29.867,45.192 27.977,47.082
  Bottom Layer w0.16: MIC_5.3 12.678,47.082 13.962,48.366 13.962,50.672 15.051,51.761 25.678,51.761 26.756,50.683 v1(26.756,48.303)
NetMIC_5_5: MIC_5.5 MIC_6.5 U2.A2 | length 40.7
  Top Layer w0.16: MIC_6.5 26.728,49.622 29.045,47.305 29.045,46.467 30,45.512 37.584,45.512 39.262,43.834 U2.A2
  Bottom Layer w0.16: MIC_5.5 12.378,49.622 14.837,52.081 25.851,52.081 27.31,50.622 v1(27.31,49.031)
NetMIC_6_1: MIC_6.1 R10.2 U.14 | length 82.8
  Top Layer w0.18: MIC_6.1 24.194,43.194 23.445,42.445 17.943,42.445 17.001,41.503 17.001,11.979 20.448,8.532 33.292,8.532 38.611,13.851 42.051,13.851 43.879,15.679 U.14
  Bottom Layer w0.18: MIC_6.1 25.726,44.542 28.446,47.262 31.673,47.262 32.084,46.851 32.084,46.537 32.522,46.099 R10.2
NetMIC_7_1: MIC_7.1 R12.2 U.16 | length 112.5
  Top Layer w0.18: MIC_7.1 10.85,59.084 11.653,58.281 15.439,58.281 16.321,57.399 16.321,11.698 20.167,7.852 33.574,7.852 38.893,13.171 42.333,13.171 43.841,14.679 U.16
  Bottom Layer w0.18: MIC_7.1 10.85,58.191 12.275,56.766 22.547,56.766 28.496,50.817 R12.2
NetMIC_7_3: MIC_7.3 MIC_8.3 U3.A1 | length 47.2
  Top Layer w0.16: MIC_8.3 25.686,63.64 26.797,62.529 26.797,57.787 v1(27.627,56.957) ; v1@27.622,56.952 31.058,53.516 33.059,53.516 39.098,47.477 U3.A1
  Bottom Layer w0.16: MIC_7.3 14.757,63.64 20.845,57.552 26.379,57.552 26.974,56.957 v1(27.627,56.957)
NetMIC_7_5: MIC_7.5 MIC_8.5 U3.A2 | length 49.9
  Top Layer w0.16: MIC_8.5 25.635,66.18 27.127,64.688 27.127,58.577 v1(27.832,57.872) 27.832,57.581 31.577,53.836 33.192,53.836 39.151,47.877 U3.A2
  Bottom Layer w0.16: MIC_7.5 12.67,66.18 20.978,57.872 v1(27.832,57.872)
NetMIC_8_1: MIC_8.1 R14.2 U.15 | length 104.6
  Top Layer w0.18: MIC_8.1 24.194,59.549 22.934,58.289 17.46,58.289 16.661,57.49 16.661,11.838 20.307,8.192 33.433,8.192 38.752,13.511 42.192,13.511 43.86,15.179 U.15
  Bottom Layer w0.18: MIC_8.1 25.914,61.1 29.06,57.954 29.06,55.04 32.089,52.011 32.089,51.214 32.486,50.817 R14.2
NetR1_2: R1.2 U8.3 | length 5.8
  Top Layer w0.18: R1.2 78.849,41.681 79.629,40.901 U8.3
NetR2_2: R2.2 U8.6 | length 6.7
  Top Layer w0.18: U8.6 76.25,40.901 76.695,41.346 76.695,44.912 76.159,45.448 R2.2
NetR4_2: R4.2 U0.B1 U1.B1 U2.B1 U3.B1 U.9 | length 45.1
  Top Layer w0.16: v1(42.725,34.348) U0.B1 ; v1(42.725,38.391) U1.B1 ; v1(42.725,42.434) U2.B1 ; v1(42.725,46.477) U3.B1
  Top Layer w0.18: v1(40.319,31.009) 41.243,31.933 R4.2 ; v1(42.983,18.59) 43.394,18.179 U.9
  Bottom Layer w0.18: v1(42.725,34.348) 41.505,33.128 ; v1(42.725,38.391) 41.505,37.171 ; v1(42.725,42.434) 41.505,41.214 ; v1(42.725,46.477) 41.505,45.257 41.505,41.214 ; v1(42.983,18.59) 42.983,19.022 40.295,21.71 40.295,31.918 41.505,33.128 ; 41.505,33.128 41.505,37.171 ; 41.505,37.171 41.505,41.214
NetR6_2: R6.2 U.60 | length 4.2
  Top Layer w0.18: U.60 R6.2@49.786,28.135
NetR17_1: R17.1 USB_2.0.4 | length 5.9
  Top Layer w0.18: R17.1 83.955,28.398 86.142,26.211 USB_2.0.4
NetR18_2: R18.2 U4.2 U4.3 U5.2 U5.3 U.20 | length 72
  Top Layer w0.18: R18.2 36.469,55.622 v1(37.103,56.256) ; v1(38.573,57.324) 40.061,57.324 v1(40.125,57.26) ; U4.3 40.45,55.295 v1(40.125,55.62) 40.45,55.945 U4.2 ; U5.3 40.45,59.105 v1(40.125,59.43) 40.45,59.755 U5.2 ; U.20 49.286,15.356 v1(53.296,19.366)
  Bottom Layer w0.18: v1(37.103,56.256) 38.171,57.324 v1(38.573,57.324) ; v1(40.125,59.43) v1(40.125,57.26) v1(40.125,55.62) 40.125,51.743 40.761,51.107 51.544,51.107 53.296,49.355 v1(53.296,19.366)
NetR20_1: R20.1 U4.7 | length 3.4
  Top Layer w0.18: U4.7 47.836,55.945 48.461,56.57 R20.1
NetR21_1: R21.1 U4.6 | length 3.4
  Top Layer w0.18: U4.6 47.85,55.295 48.475,54.67 R21.1
NetR22_1: R22.1 U5.7 | length 3.4
  Top Layer w0.18: U5.7 47.798,59.755 48.423,60.38 R22.1
NetR23_1: R23.1 U5.6 | length 3.4
  Top Layer w0.18: U5.6 47.785,59.105 48.41,58.48 R23.1
NetR26_1: R26.1 U7.7 | length 3.4
  Top Layer w0.18: U7.7 47.752,67.375 48.377,68 R26.1
NetR27_1: R27.1 U7.6 | length 3.4
  Top Layer w0.18: U7.6 47.746,66.725 48.371,66.1 R27.1
NetRc01_1: Rc01.1 Rc02.2 U0.D2 | length 7.5
  Top Layer w0.16: U0.D2 v1(45.118,35.748)
  Bottom Layer w0.18: v1(45.118,35.748) 46.58,35.748 ; Rc01.1 47.257,36.425 46.58,35.748 ; Rc02.2 47.652,34.676 46.58,35.748
NetRc11_1: Rc11.1 Rc12.2 U1.D2 | length 7.4
  Top Layer w0.16: U1.D2 v1(45.118,39.791)
  Bottom Layer w0.18: v1(45.118,39.791) 46.612,39.791 ; Rc11.1 47.29,40.469 46.612,39.791 ; Rc12.2 47.682,38.721 46.612,39.791
NetRc21_1: Rc21.1 Rc22.2 U2.D2 | length 7.4
  Top Layer w0.16: U2.D2 v1(45.118,43.834)
  Bottom Layer w0.18: v1(45.118,43.834) 46.645,43.834 ; Rc21.1 47.285,44.474 46.645,43.834 ; Rc22.2 47.754,42.725 46.645,43.834
NetRc31_1: Rc31.1 Rc32.2 U3.D2 | length 7.6
  Top Layer w0.16: U3.D2 v1(45.118,47.877)
  Bottom Layer w0.18: v1(45.118,47.877) 46.416,47.877 ; Rc31.1 47.07,48.531 46.416,47.877 ; Rc32.2 47.51,46.783 46.416,47.877
NetSPI_3: SPI.3 U.36 | length 30.5
  Top Layer w0.18: U.36 58.258,16.179 60.882,13.555 60.882,12.834 65.585,8.131 81.385,8.131 82.126,7.39 SPI.3
NetSPI_4: SPI.4 U.34 | length 30.3
  Top Layer w0.18: U.34 58.296,15.179 60.185,13.29 60.202,13.273 60.202,12.553 65.317,7.438 74.818,7.438 77.46,4.796 80.772,4.796 SPI.4
NetSPI_5: SPI.5 U.35 | length 27.7
  Top Layer w0.18: U.35 58.277,15.679 60.542,13.414 60.542,12.694 65.446,7.79 79.032,7.79 79.586,7.236 SPI.5
NetSPI_6: SPI.6 U.33 | length 27.6
  Top Layer w0.18: U.33 58.315,14.679 59.862,13.132 59.862,12.412 65.213,7.061 74.714,7.061 78.333,3.442 SPI.6
NetST-LINK_2: ST-LINK.2 U.56 | length 51
  Top Layer w0.18: U.56 51.786,25.678 53.084,26.976 64.729,26.976 v1(65.627,26.078) ; ST-LINK.2 53.885,2.395 54.295,1.985 58.254,1.985 60.707,4.438 v1(61.581,4.438)
  Bottom Layer w0.18: v1(61.581,4.438) 61.312,4.707 61.312,19.863 61.476,20.027 62.971,20.027 65.627,22.683 v1(65.627,26.078)
NetST-LINK_3: ST-LINK.3 U.50 | length 47.8
  Top Layer w0.18: ST-LINK.3 51.345,2.492 52.192,1.645 58.675,1.645 v1(60.632,3.602) ; U.50 54.786,25.879 55.203,26.296 63.434,26.296 v1(64.377,25.353)
  Bottom Layer w0.18: v1(60.632,3.602) 60.632,20.144 61.195,20.707 62.69,20.707 64.377,22.394 v1(64.377,25.353)
NetST-LINK_4: ST-LINK.4 U.46 | length 34.1
  Top Layer w0.18: U.46 60.054,21.179 v1(60.297,21.422)
  Bottom Layer w0.18: ST-LINK.4 48.805,2.6 49.518,1.887 57.612,1.887 59.952,4.227 59.952,20.426 60.297,20.771 v1(60.297,21.422)
NetST-LINK_5: ST-LINK.5 U.49 | length 50.5
  Top Layer w0.18: U.49 55.286,25.457 55.777,25.948 62.668,25.948 v1(63.883,24.733)
  Bottom Layer w0.18: ST-LINK.5 46.265,2.312 47.03,1.547 57.753,1.547 60.292,4.086 60.292,20.285 61.054,21.047 62.549,21.047 63.883,22.381 v1(63.883,24.733)
NetST-LINK_6: ST-LINK.6 U.55 | length 60.4
  Top Layer w0.18: U.55 52.286,25.535 53.387,26.636 64.037,26.636 v1(65.096,25.577)
  Bottom Layer w0.18: ST-LINK.6 43.725,2.034 44.552,1.207 58.963,1.207 61.145,3.389 61.145,4.259 60.972,4.432 60.972,20.003 61.336,20.367 62.831,20.367 65.096,22.632 v1(65.096,25.577)
NetU0_B2: U0.B2 U1.B2 U2.B2 U3.B2 U.29 | length 62.5
  Top Layer w0.16: U0.B2 v1(42.725,36.748) ; U1.B2 v1(42.725,40.791) ; U2.B2 v1(42.725,44.834) ; U3.B2 v1(42.725,48.877)
  Top Layer w0.18: v1(40.917,36.419) 41.246,36.748 v1(42.725,36.748) ; v1(40.938,40.347) 41.382,40.791 v1(42.725,40.791) ; v1(40.942,44.547) 41.229,44.834 v1(42.725,44.834) ; v1(53.786,11.177) U.29
  Bottom Layer w0.18: v1(42.725,48.877) 40.934,47.086 40.942,47.078 v1(40.942,44.547) 40.942,33.349 39.819,32.226 39.819,21.705 42.483,19.041 42.483,18.383 43.283,17.583 43.283,11.911 44.697,10.497 47.693,10.497 48.373,11.177 v1(53.786,11.177)
NetU0_C2: U0.C2 U1.C2 U2.C2 U3.C2 U.17 | length 51.9
  Top Layer w0.16: U0.C2 43.125,36.235 43.538,36.648 v1(43.538,37.011) ; U1.C2 43.125,40.305 43.528,40.708 v1(43.528,41.156) ; U2.C2 43.125,44.365 43.577,44.817 v1(43.577,45.203) ; U3.C2 43.125,48.374 43.528,48.777 v1(43.528,49.299)
  Top Layer w0.18: v1(47.268,10.998) 47.786,11.516 U.17
  Bottom Layer w0.18: v1(43.528,49.299) 43.577,49.25 v1(43.577,45.203) 43.528,45.154 v1(43.528,41.156) 43.538,41.146 v1(43.538,37.011) 43.538,33.316 40.688,30.466 40.688,21.798 43.623,18.863 43.623,12.149 44.774,10.998 v1(47.268,10.998)
NetU4_1: U4.1 U4.4 U.21 | length 61.8
  Top Layer w0.18: U4.4 40.143,54.645 v1(39.168,55.62) 40.143,56.595 U4.1 ; U.21 v1(49.786,14.919)
  Bottom Layer w0.18: v1(39.168,55.62) 39.168,51.738 40.479,50.427 51.262,50.427 52.616,49.073 52.616,20.029 49.786,17.199 v1(49.786,14.919)
NetU5_1: U5.1 U5.4 U.23 | length 65.5
  Top Layer w0.18: U5.4 40.143,58.455 v1(39.168,59.43) 40.143,60.405 U5.1 ; U.23 v1(50.786,15.868)
  Bottom Layer w0.18: v1(39.168,59.43) 39.168,58.819 39.69,58.297 39.69,51.697 40.62,50.767 51.403,50.767 52.956,49.214 52.956,19.888 50.786,17.718 v1(50.786,15.868)
NetU7_1: U7.1 U7.4 U.40 | length 74.1
  Top Layer w0.18: U7.4 40.143,66.075 v1(39.168,67.05) ; U7.1 40.143,68.025 v1(39.168,67.05) ; v1(53.781,18.179) U.40 ; v1(54.49,46.035) 54.916,46.461 54.916,48.482 53.055,50.343 39.472,50.343 38.02,51.795 38.02,65.902 v1(39.168,67.05)
  Bottom Layer w0.18: v1(53.781,18.179) 54.039,18.437 54.039,45.584 v1(54.49,46.035)
NetU7_2: U7.2 U7.3 U.62 | length 61.9
  Top Layer w0.18: U7.3 40.45,66.725 v1(40.125,67.05) 40.45,67.375 U7.2 ; U.62 v1(48.786,30.717)
  Bottom Layer w0.18: v1(40.125,67.05) 40.125,63.298 38.489,61.662 38.489,58.686 39.332,57.843 39.332,56.595 38.352,55.615 38.352,51.493 39.758,50.087 51.122,50.087 52.276,48.933 52.276,34.854 48.786,31.364 v1(48.786,30.717)
NetU_3: U.3
NetU_4: U.4
NetU_41: U.41 USART.1 | length 27.9
  Top Layer w0.18: U.41 58.482,18.679 61.291,15.87 76.475,15.87 80.85,11.495 USART.1
NetU_42: U.42 USART.2 | length 27.1
  Top Layer w0.18: U.42 58.463,19.179 61.432,16.21 76.616,16.21 78.791,14.035 USART.2
NetU_43: U.43 USART.4 | length 30.7
  Top Layer w0.18: U.43 58.444,19.679 61.573,16.55 83.465,16.55 84.588,15.427 USART.4
U5V: D2.2 USB_2.0.1 | length 19.6
  Top Layer w0.28: USB_2.0.1 90.588,23.811 91.169,24.392 95.092,24.392 95.972,25.272 95.972,33.343 94.767,34.548 D2.2
V_CABLE: C1.1 C2.2 C3.2 D1.2 ETH.4 | length 35.9
  Top Layer w0.28: ETH.4 93.406,61.26 94.104,60.562 94.104,56.96 93.445,56.301 C1.1 93.445,43.497 94.718,42.224 94.718,41.208 ; C3.2 94.255,38.926 94.718,39.389 ; C2.2 94.285,40.775 94.718,41.208 ; D1.2 94.02,36.852 94.718,37.55 94.718,39.389 ; 94.718,39.389 94.718,41.208
VCC: C8.2 C9.2 C10.2 C11.2 C12.2 C13.2 C14.2 C15.2 C21.2 C22.2 C23.2 C24.2 C25.1 C26.1 C28.1 C31.1 L.2 MIC_1.2 MIC_2.2 MIC_2.4 MIC_3.2 MIC_4.2 MIC_4.4 MIC_5.2 MIC_6.2 MIC_6.4 MIC_7.2 MIC_8.2 MIC_8.4 R3.2 R5.2 Rc01.2 Rc11.2 Rc21.2 Rc31.2 SPI.1 ST-LINK.1 U0.D1 U1.D1 U2.D1 U3.D1 U4.8 U5.8 U7.8 U8.5 U.13 U.19 U.32 U.48 U.64 | length 496.6
  Top Layer w0.16: U0.D1 44.65,35.348 45.375,34.623 C21.2 ; U1.D1 44.669,39.391 45.394,38.666 C22.2 ; U2.D1 44.698,43.434 45.423,42.709 C23.2 ; U3.D1 44.642,47.477 45.367,46.752 C24.2
  Top Layer w0.28: MIC_1.2 6.147,11.425 5.327,10.605 ; MIC_3.2 6.587,27.983 5.327,26.723 ; MIC_5.2 6.264,44.542 5.327,43.605 ; MIC_7.2 6.536,61.1 5.327,59.891 ; v1(13.384,41.464) 6.116,41.464 5.327,40.675 ; MIC_8.2 19.13,61.1 17.901,62.329 17.901,65.382 ; MIC_8.4 19.643,63.64 17.901,65.382 ; v1(38.131,14.348) 39.011,14.348 39.475,14.812 C15.2 C14.2@41.306,15.373 ; C14.2 42.193,15.391 42.981,16.179 U.13 ; v1(43.775,6.15) 7.732,6.15 5.327,8.555 5.327,10.605 ; U4.8 47.254,56.595 v1(47.663,57.004) ; U5.8 47.253,60.405 v1(47.663,60.815) ; U7.8 47.308,68.025 v1(47.582,68.299) ; C22.2 47.589,38.666 48.43,39.507 ; C21.2 47.815,34.623 48.43,35.238 ; C23.2 47.537,42.709 48.472,43.644 49.919,43.644 ; C24.2 47.963,46.752 49.25,45.465 49.25,44.313 49.919,43.644 ; U.64 47.786,25.598 46.616,26.768 45.785,26.768 45.299,27.254 C12.2 45.299,29.979 48.43,33.11 48.43,35.238 ; v1(48.716,52.772) 49.359,52.129 55.57,52.129 57.457,50.242 ; U.19 48.786,11.088 49.443,10.431 C9.2 49.448,9.567 v1(49.448,8.289) ; U.32 55.286,11.644 55.697,11.233 57.41,11.233 57.919,10.724 C10.2 57.919,7.482 v1(57.965,7.436) ; C13.2 55.701,42.94 56.405,43.644 ; U.48 58.625,22.179 60.309,23.863 C11.2 v1(63.066,23.863) ; C8.2 57.796,42.884 58.556,43.644 ; v1(59.206,16.592) 59.206,15.782 61.272,13.716 61.272,12.996 65.747,8.521 71.901,8.521 ; v1(59.206,28.578) 59.206,31.414 57.175,33.445 ; C31.1 57.849,49.85 57.457,50.242 ; R3.2 57.175,33.445 ; R5.2 70.844,9.578 71.901,8.521 ; U8.5 71.4,42.171 69.927,43.644 L.2 58.556,43.644 ; SPI.1 84.666,7.581 83.726,8.521 71.901,8.521 ; 5.327,10.605 5.327,26.723 ; 5.327,26.723 5.327,40.675 ; 5.327,40.675 5.327,43.605 ; 5.327,43.605 5.327,59.891 ; 5.327,59.891 5.327,67.886 7.391,69.95 16.406,69.95 17.901,68.455 17.901,65.382 ; 48.43,35.238 48.43,39.507 ; 48.43,39.507 48.43,42.155 49.919,43.644 ; 49.919,43.644 55.578,43.644 ; 55.578,43.644 56.405,43.644 ; 55.578,43.644 54.141,42.207 54.141,36.479 57.175,33.445 ; 56.405,43.644 58.556,43.644 ; 57.457,50.242 57.457,44.743 58.556,43.644
  Bottom Layer w0.28: v1(5.336,24.975) 14.125,24.975 17.133,27.983 ; v1(13.384,41.464) 18.576,41.464 19.346,42.233 19.346,43.804 ; v1(18.213,6.142) 18.213,9.47 ; MIC_2.2 20.168,11.425 18.213,9.47 ; MIC_2.4 19.822,13.965 18.213,12.356 18.213,9.47 ; MIC_4.2 17.133,27.983 ; MIC_4.4 19.673,30.523 17.133,27.983 ; MIC_6.2 20.084,44.542 19.346,43.804 ; MIC_6.4 20.196,47.082 19.346,46.232 19.346,43.804 ; v1(38.131,14.348) 38.131,11.794 v1(43.775,6.15) 50.54,6.15 ; v1(47.582,68.299) 48.045,68.762 C28.1 C26.1 ; v1(47.663,57.004) 48.072,57.413 C25.1 ; v1(47.663,60.815) 48.044,61.196 C26.1 ; v1(48.716,52.772) 48.671,52.817 C25.1 ; v1(49.448,8.289) 49.448,7.242 50.54,6.15 ; Rc01.2 51.177,36.425 51.683,36.931 51.683,41.167 ; Rc11.2 50.985,40.469 51.683,41.167 ; Rc21.2 50.97,44.474 51.683,45.187 ; Rc31.2 51.193,48.531 51.683,48.041 51.683,45.187 ; ST-LINK.1 58.6,3.625 59.206,4.231 59.206,8.677 ; v1(59.206,28.578) 59.206,25.101 ; v1(63.066,23.863) 60.444,23.863 59.206,25.101 ; C25.1 C26.1 ; 50.54,6.15 56.679,6.15 v1(57.965,7.436) 59.206,8.677 ; 51.683,41.167 51.683,45.187 ; 59.206,8.677 v1(59.206,16.592) 59.206,25.101
  other v1: 51.676,43.633
pads on no net: ETH. Srst.1 U.2 U.8 U.26 U.27 U.28 U.37 U.38 U.39 U.51 U.52 U.53 U.54 U.57 U.58 U.59 U.61 USB_2.0. USB_2.0.Shell
copper on no net:
  other v1: 69.045,3.567 73.351,3.567 76.597,11.038 92.16,13.004 63.481,13.843 63.481,18.46

## Polygon pours and split planes (outlines as drawn)
GND on Top Layer "GND_TOP" (solid, remove dead copper, pour order 0): 0,78 97,78 97,0 0,0
GND on Bottom Layer "GND_BOT" (solid, remove dead copper, pour order 2): 0,0 97,0 97,78 0,78

## Keep-outs
Keep-Out Layer:
  circle w0.254: c4,74 r2
  circle w0.254: c4,4 r2
  circle w0.254: c93,74 r2
  circle w0.254: c93,4 r2
  lines w0.1: 0,0 97,0 97,78 0,78 0,0

## Other copper
Top Layer:
  pour cut-out: 44.9,25.1 58.2,25.1 58.2,11.75 44.9,11.75
  pour cut-out: 41.814,48.378 44.035,48.378 44.035,46.955 41.814,46.955
  pour cut-out: 41.818,44.351 44.039,44.351 44.039,42.928 41.818,42.928
  pour cut-out: 41.818,40.311 44.039,40.311 44.039,38.888 41.818,38.888
  pour cut-out: 41.818,36.255 44.039,36.255 44.039,34.832 41.818,34.832
Bottom Layer:
  pour cut-out: 41.501,48.685 44.436,48.685 44.436,34.461 41.501,34.461

## Silkscreen, mask and mechanical layers (free items; w line width, h text height)
Top Overlay:
  lines w0.127: 41.743,42.857 44.106,42.857 44.106,44.416 41.743,44.416 41.743,42.857 ; 41.745,38.82 44.108,38.82 44.108,40.379 41.745,40.379 41.745,38.82 ; 41.746,46.895 41.746,48.454 44.109,48.454 44.109,46.895 41.746,46.895 ; 41.748,34.766 44.111,34.766 44.111,36.325 41.748,36.325 41.748,34.766
  text "TX" at 78.107,13.635 h1
  text "RX" at 87.663,13.604 h1
  text "CLK" at 77.275,11.107 h1
  text "GND" at 87.663,10.861 h1
  text "CS" at 78.199,8.025 h1
  text "CLK" at 81.035,7.932 h1
  text "VCC" at 85.043,7.778 h1
  text "NRST" at 41.034,5.51 h0.5 r45
  text "GND" at 38.594,5.492 h0.5 r45
  text "NJTRST" at 54.006,5.458 h0.5 r45
  text "JTDI" at 51.223,5.441 h0.5 r45
  text "VCC" at 56.395,5.406 h0.5 r45
  text "JTCK / SWCLK" at 46.601,5.114 h0.5 r45
  text "JTMS / SWDIO" at 49.481,4.994 h0.5 r45
  text "JTDO / TRACES WO" at 43.869,4.943 h0.5 r45
  text "MISO" at 76.134,0.811 h1
  text "MOSI" at 80.481,0.78 h1
  text "GND" at 84.95,0.75 h1